# Altium PCB Display.PcbDoc
Units mm, origin at the board's own origin, x right, y up, seen from the top; angles counter-clockwise.
Board outline 46 x 22 mm, 2 copper layers (Top Layer, Bottom Layer), stack 1.671 mm thick; 11 components, 22 nets, 71 pads, 47 vias.
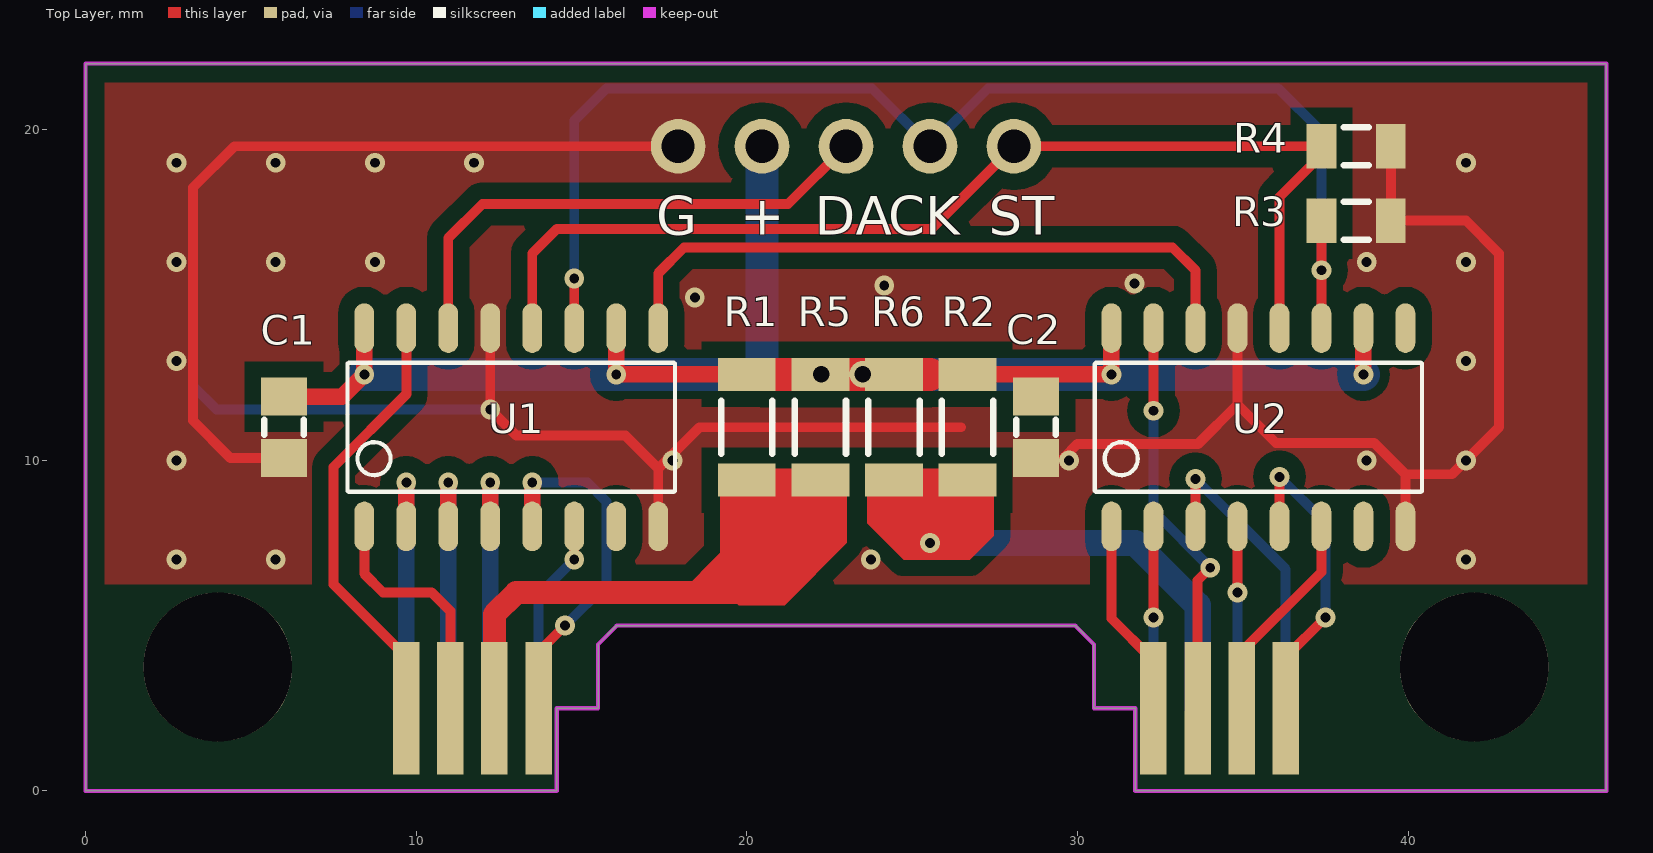
[diagram p0: Top Layer view]
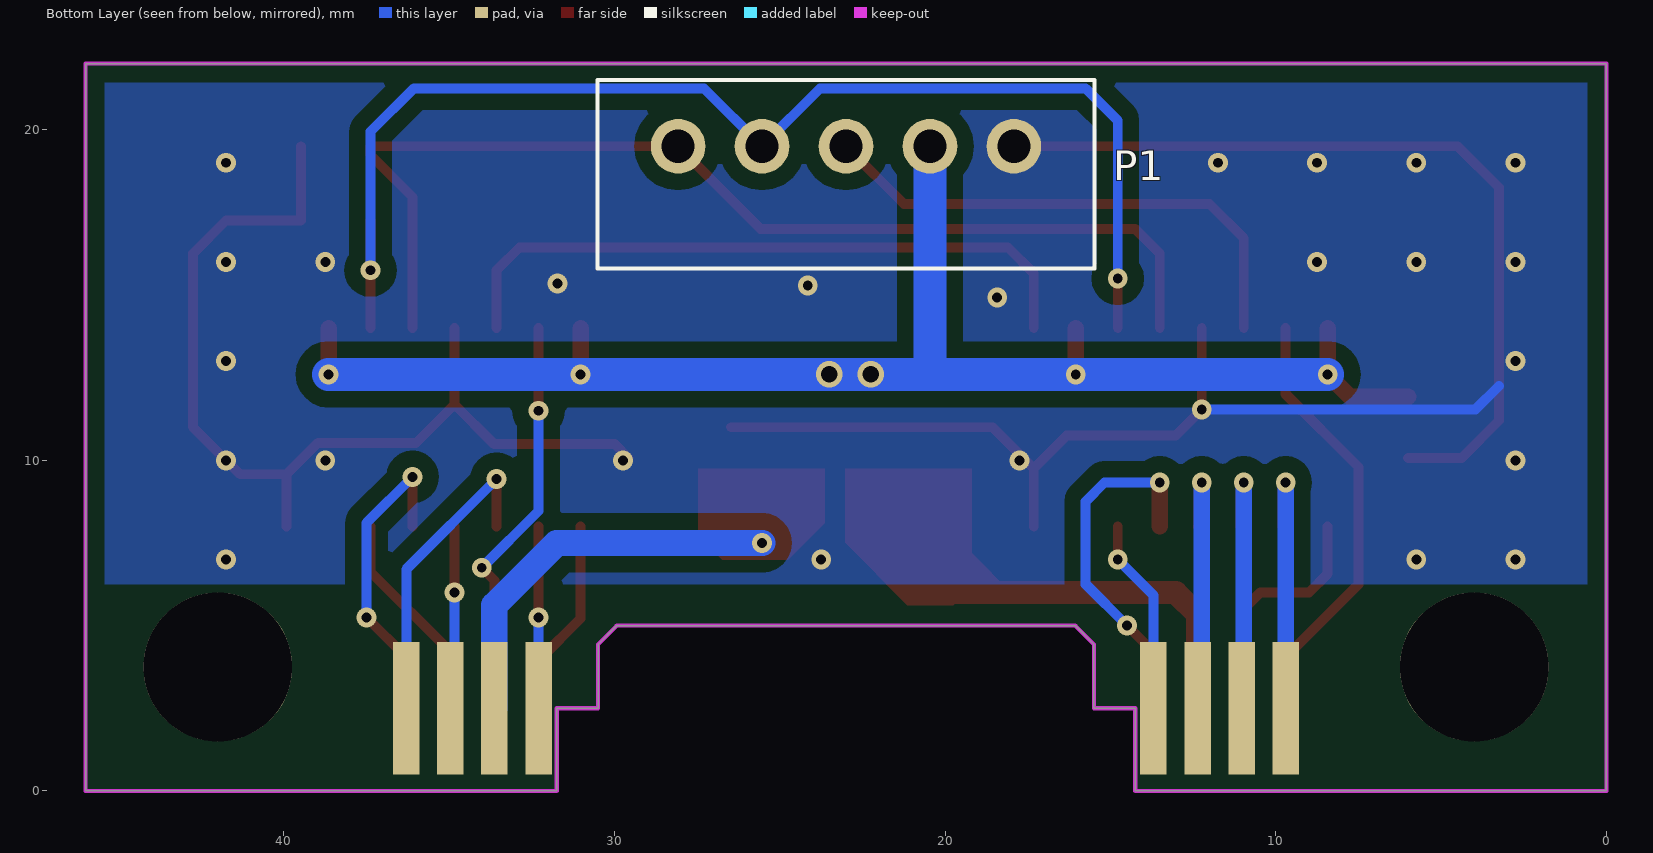
[diagram p1: Bottom Layer view, seen from below]

## Layer stack, top to bottom
Top Solder: solder mask 0.0102, Solder Resist, Dk 3.5
Top Layer: signal copper 0.0356
Dielectric 1: dielectric 1.6, FR-4, Dk 4.8
Bottom Layer: signal copper 0.0356
Bottom Solder: solder mask 0.0102, Solder Resist, Dk 3.5

## Board outline
0,0 0,22 46,22 46,0 31.75,0 31.75,2.5 30.5,2.5 30.5,4.432 29.932,5 16.068,5 15.5,4.432 15.5,2.5 14.25,2.5 14.25,0

## Design rules (kind name [scope] priority, off if disabled: settings)
Clearance [All] p1: gap=0.25
PlaneConnect [All] p1: planeconnectstyle=Direct reliefexpansion=0.508 reliefentries=4 reliefconductorwidth=0.254 reliefairgap=0.254
PolygonConnect [All] p1: connectstyle=Direct reliefconductorwidth=0.254 reliefentries=4 polygonreliefangle="90 Angle" airgapwidth=0.254
RoutingVias [All] p1: holewidth=0.3 width=0.6 viastyle="Through Hole" minholewidth=0.2 minwidth=0.5 maxholewidth=3 maxwidth=5
SolderMaskExpansion SolderMaskExpansion_via [ViaSize] p1: expansion=0 soldermaskfromhole=TRUE
SolderMaskExpansion [All] p2: expansion=0.102
Width [All] p1: maxlimit=254 minlimit=0.1 preferedwidth=0.254
29 further rules are at their usual default settings.

## Classes and differential pairs
component class Display: C1 C2 P1 R1 R2 R3 R4 U1 U2

## Components (designator, comment, footprint, x,y, rotation, side; value= is the part's Value field where it differs from the comment)
C1 "0.1uF" C0805 6,11 r270 top
C2 "0.1uF" C0805 28.75,11 r270 top
P1 "Display" CONN-5POS-PITCH2.54MM 23,19.5 r0 bottom
R1 "100" R1206 20,11 r90 top
R2 "100" R1206 26.675,11 r90 top
R3 "10K" R0805 38.43,17.25 r0 top
R4 "10K" R0805 38.43,19.5 r0 top
R5 "100" R1206 22.225,11 r90 top (schematic designator R1)
R6 "100" R1206 24.45,11 r90 top (schematic designator R1)
U1 "74HC595" 16-SOIC 12.875,11 r0 top
U2 "74HC595" 16-SOIC 35.475,11 r0 top

## Footprints (in the part's own frame and the unit in brackets; to place one, negate y for a bottom-side part, rotate by r counter-clockwise, add the part's x,y. Pads: shape width x height; smd on the part's side, far side on the other; paste and mask are expansions set on the pad)
16-SOIC [mm]
  oval 0.6x1.5 smd: 1(-4.445,-2.999) 2(-3.175,-2.999) 3(-1.905,-2.999) 4(-0.635,-2.999) 5(0.635,-2.999) 6(1.905,-2.999) 7(3.175,-2.999) 8(4.445,-2.999) 9(4.445,2.999) 10(3.175,2.999) 11(1.905,2.999) 12(0.635,2.999) 13(-0.635,2.999) 14(-1.905,2.999) 15(-3.175,2.999) 16(-4.445,2.999)
  silkscreen extent -4.95,-1.95 4.95,1.95, body extent -4.95,-3 4.95,3, height 1.3
C0805 [mm] "Chip Capacitor, 2-Leads, Body 2.0x1.3mm, IPC Medium Density"
  rect 1.15x1.4 smd: 1(-0.925,0) 2(0.925,0)
  silkscreen extent -0.22,-0.6 0.23,0.6, body extent -1,-0.62 1,0.63, height 0.5
CONN-5POS-PITCH2.54MM [mil]
  round 65 hole 39.37: 1(-200,0) 2(-100,0) 3(0,0) 4(100,0) 5(200,0)
  silkscreen extent -296,-79 296,146, body extent -296,-79 296,146, height 276
R0805 [mm] "Chip Resistor, 2-Leads, Body 2.0x1.3mm, IPC Medium Density"
  rect 0.9x1.35 smd: 1(-1.05,0) 2(1.05,0)
  silkscreen extent -0.38,-0.58 0.38,0.58, body extent -1,-0.62 1,0.63, height 0.5
R1206 [mm] "Chip Resistor, 2-Leads, Body 3.2x1.6mm, IPC Medium Density"
  rect 1x1.75 smd: 1(-1.6,0) 2(1.6,0)
  silkscreen extent -0.8,-0.77 0.8,0.77, body extent -1.6,-0.8 1.6,0.8, height 0.7

## Part data
C1 C2: library part Cap, "CAP CER 0.1UF 50V 10% X8R 0805"
P1: library part "Header 5", "Header, 5-Pin"
R1 R2 R5 R6: library part Res2, "RES 100 OHM 3W 5% AXIAL"
R3 R4: library part Res1, "RES 10K OHM 1/8W 1% 0805 SMD"
U1 U2: library part SN74HC595N, "IC 8BIT SHIFT REG 3ST-OUT 16SOIC"

## Free pads (board coordinates)
  rect 0.8x4 smd: 0(9.7,2.5) 0(36.3,2.5) 1(11.033,2.5) 1(34.967,2.5) 2(12.367,2.5) 2(13.7,2.5) 2(32.3,2.5) 2(33.633,2.5)
  rect 0.8x4 smd far side: 0(9.7,2.5) 0(36.3,2.5) 1(11.033,2.5) 1(34.967,2.5) 2(12.367,2.5) 2(13.7,2.5) 2(32.3,2.5) 2(33.633,2.5)
  round 4.5 hole 4.5: 3(4,3.75) 4(42,3.75)

## Via types
v1: diameter 0.6, hole 0.3, Top Layer to Bottom Layer, 45 vias
v2: diameter 0.8, hole 0.5, Top Layer to Bottom Layer, 2 vias

## Nets (pads, with @x,y where several pads share a name; then routed paths per layer and width w, separated by ;. In a path a pad name is that pad's centre, name@x,y a point inside that pad or via, vN(x,y) a via of type N, cw(c..) or ccw(c..) an arc to the next point about the centre after c; other vN are vias at no path point)
+5V: C1.1 C2.1 P1.2 R1.2 R2.2 R5.2 R6.2 U1.10 U1.16 U2.10 U2.16 | length 60.4
  Top Layer w0.5: C1.1 7.755,11.925 v1(8.43,12.6) U1.16 ; U1.10 v1(16.05,12.6) R1.2@20.46,12.6 ; 25.54,12.6 v1(31.03,12.6) U2.16 ; v1(38.65,12.6) U2.10
  Top Layer w1: R1.2@20.46,12.6 25.54,12.6
  Bottom Layer w1: v1(8.43,12.6) 19.25,12.6 v1(31.03,12.6) v1(38.65,12.6) ; 20.46,12.6 P1.2
  other v2: 22.25,12.6 23.5,12.6
A1: pad.0@9.7,2.5 U1.15 | length 13.3
  Top Layer w0.3: pad.0@9.7,2.5 9.7,4.05 7.5,6.25 7.5,9.8 9.7,12 U1.15
A2: pad.2@33.633,2.5 U2.15 | length 12.4
  Top Layer w0.3: v1(32.3,11.5) U2.15 ; pad.2@33.633,2.5 33.633,6.367 v1(34.017,6.75)
  Bottom Layer w0.3: v1(32.3,11.5) 32.3,8.467 v1(34.017,6.75)
B1: pad.1@11.033,2.5 U1.1 | length 7.4
  Top Layer w0.3: U1.1 8.43,6.57 9,6 10.47,6 11.033,5.437 pad.1@11.033,2.5
B2: pad.2@32.3,2.5 U2.1 | length 6.5
  Top Layer w0.3: U2.1 31.03,5.22 32.25,4 pad.2@32.25,3.75 ; pad.2@32.3,2.5 pad.2@32.3,4.275
C1: pad.0@9.7,2.5 U1.2 | length 8.1
  Top Layer w0.5: U1.2 v1(9.7,9.325)
  Bottom Layer w0.5: pad.0@9.7,2.5 v1(9.7,9.325)
C2: pad.2@32.3,2.5 U2.2 | length 5.5
  Top Layer w0.3: v1(32.3,5.25) U2.2
  Bottom Layer w0.3: pad.2@32.3,2.5 v1(32.3,5.25)
COM1: pad.2@12.367,2.5 R1.1 R5.1 | length 14.9
  Top Layer w0.7: pad.2@12.367,2.5 12.367,5.342 13.025,6 20.56,6 21.113,6.553 21.113,9.4
COM2: pad.2@33.633,2.5 R2.1 R6.1 | length 13.7
  Top Layer w0.8: v1(25.54,7.5) 25.54,9.25
  Bottom Layer w0.8: v1(25.54,7.5) 31.75,7.5 33.633,5.617 pad.2@33.633,2.5
D1: pad.1@11.033,2.5 U1.3 | length 8.2
  Top Layer w0.5: U1.3 v1(10.97,9.325)
  Bottom Layer w0.5: v1(10.97,9.325) 10.97,2.563 pad.1@11.033,2.5
D2: pad.0@36.3,2.5 U2.3 | length 9.5
  Top Layer w0.3: U2.3 v1(33.57,9.437)
  Bottom Layer w0.3: v1(33.57,9.437) 36.3,6.707 pad.0@36.3,2.5
DATA: P1.3 U1.14 | length 15.9
  Top Layer w0.3: U1.14 10.97,16.72 12,17.75 21.25,17.75 P1.3
DATA1: U1.9 U2.14 | length 20.3
  Top Layer w0.3: U1.9 17.32,15.66 18.1,16.44 32.88,16.44 33.57,15.75 U2.14
E1: pad.2@12.367,2.5 U1.4 | length 8.2
  Top Layer w0.5: v1(12.24,9.325) U1.4 U1.4@12.25,8.011
  Bottom Layer w0.5: v1(12.24,9.325) 12.24,2.627 pad.2@12.367,2.5
E2: pad.1@34.967,2.5 U2.4 | length 5.5
  Top Layer w0.3: v1(34.84,6) U2.4
  Bottom Layer w0.3: pad.1@34.84,2.5 v1(34.84,6)
F1: pad.2@13.7,2.5 U1.5 | length 10.9
  Top Layer w0.3: pad.2@13.7,2.5 13.7,4.2 v1(14.5,5)
  Top Layer w0.5: U1.5 v1(13.51,9.325)
  Bottom Layer w0.3: v1(13.51,9.325) 15.18,9.325 15.75,8.755 15.75,6.25 v1(14.5,5)
F2: pad.0@36.3,2.5 U2.5 | length 9.6
  Top Layer w0.3: U2.5 v1(36.11,9.5) ; pad.0@36.3,2.5 36.3,4.05 v1(37.5,5.25)
  Bottom Layer w0.3: v1(36.11,9.5) 37.5,8.11 v1(37.5,5.25)
G1: pad.2@13.7,2.5 U1.6 | length 5.9
  Top Layer w0.3: v1(14.78,7) U1.6
  Bottom Layer w0.3: pad.2@13.7,2.5 13.7,5.92 v1(14.78,7)
G2: pad.1@34.967,2.5 U2.6 | length 6.5
  Top Layer w0.3: pad.1@34.967,2.5 34.967,4.212 37.38,6.625 U2.6
GND: C1.2 C2.2 P1.1 R3.2 R4.2 U1.8 U1.13 U2.8 U2.13 | length 84.8
  Top Layer w0.3: C1.2 4.375,10.075 3.25,11.2 3.25,18.25 4.5,19.5 P1.1 ; U1.13 v1(12.24,11.535) 13.025,10.75 16.325,10.75 17.32,9.755 ; U1.8 17.32,9.755 ; 26.475,11 18.565,11 17.32,9.755 ; v1@29.575,10.075 30,10.5 33.655,10.5 34.84,11.685 ; U2.13 34.84,11.685 ; R4.2 R3.2 41.75,17.25 42.75,16.25 42.75,11 41.33,9.58 39.92,9.58 ; U2.8 39.92,9.58 ; 34.84,11.685 36.002,10.523 38.977,10.523 39.92,9.58
  Bottom Layer w0.3: 3.25,12.25 3.965,11.535 v1(12.24,11.535)
  other v1: 2.75,7 5.75,7 23.75,7 41.75,7 2.75,10 17.75,10 29.75,10 38.75,10 41.75,10 2.75,13 41.75,13 18.427,14.929 24.158,15.291 31.729,15.347 2.75,16 5.75,16 8.75,16 38.75,16 41.75,16 2.75,19 5.75,19 8.75,19 11.75,19 41.75,19
SCLK: P1.4 R3.1 U1.11 U2.11 | length 38.7
  Top Layer w0.3: U1.11 v1(14.78,15.5) ; U2.11 v1(37.38,15.75) R3.1
  Bottom Layer w0.3: v1(14.78,15.5) 14.78,20.28 15.75,21.25 23.79,21.25 P1.4 27.29,21.25 36.075,21.25 37.38,19.945 v1(37.38,15.75)
STR: P1.5 R4.1 U1.12 U2.12 | length 33.5
  Top Layer w0.3: U1.12 13.51,16.26 14.25,17 25.58,17 P1.5 R4.1 37.38,19.24 36.11,17.97 U2.12
pads on no net: U1.7 U2.7 U2.9

## Polygon pours and split planes (outlines as drawn)
GND on Top Layer "Top Layer-No Net" (solid, remove dead copper, pour order 0): 0,22 46,22 46,6.25 0,6.25
GND on Bottom Layer "Top Layer-No Net" (solid, remove dead copper, pour order 2): 0,22 46,22 46,6.25 0,6.25

## Keep-outs
Keep-Out Layer:
  the board outline again, w0.127

## Other copper
Top Layer:
  region net COM2: 23.65,9.75 23.65,8.1 24.75,7 26.75,7 27.475,7.725 27.475,9.75
  region net COM1: 19.2,9.75 19.2,7.2 18,6 18.25,5.75 19.617,5.75 19.75,5.617 21.142,5.617 23.025,7.5 23.025,9.75

## Silkscreen, mask and mechanical layers (free items; w line width, h text height)
Top Overlay:
  text "G" at 17.257,16.43 h2
  text "+" at 19.797,16.43 h2
  text "DA" at 22.056,16.43 h2
  text "CK" at 24.285,16.43 h2
  text "ST" at 27.317,16.43 h2